# Altium PCB daq.PcbDoc (part 1 of 2)
Units mil, origin at the board's own origin, x right, y up, seen from the top; angles counter-clockwise.
Board outline 3518.7 x 2235.24 mil, 2 copper layers (Top Layer, Bottom Layer); 88 components, 70 nets, 370 pads, 56 vias.
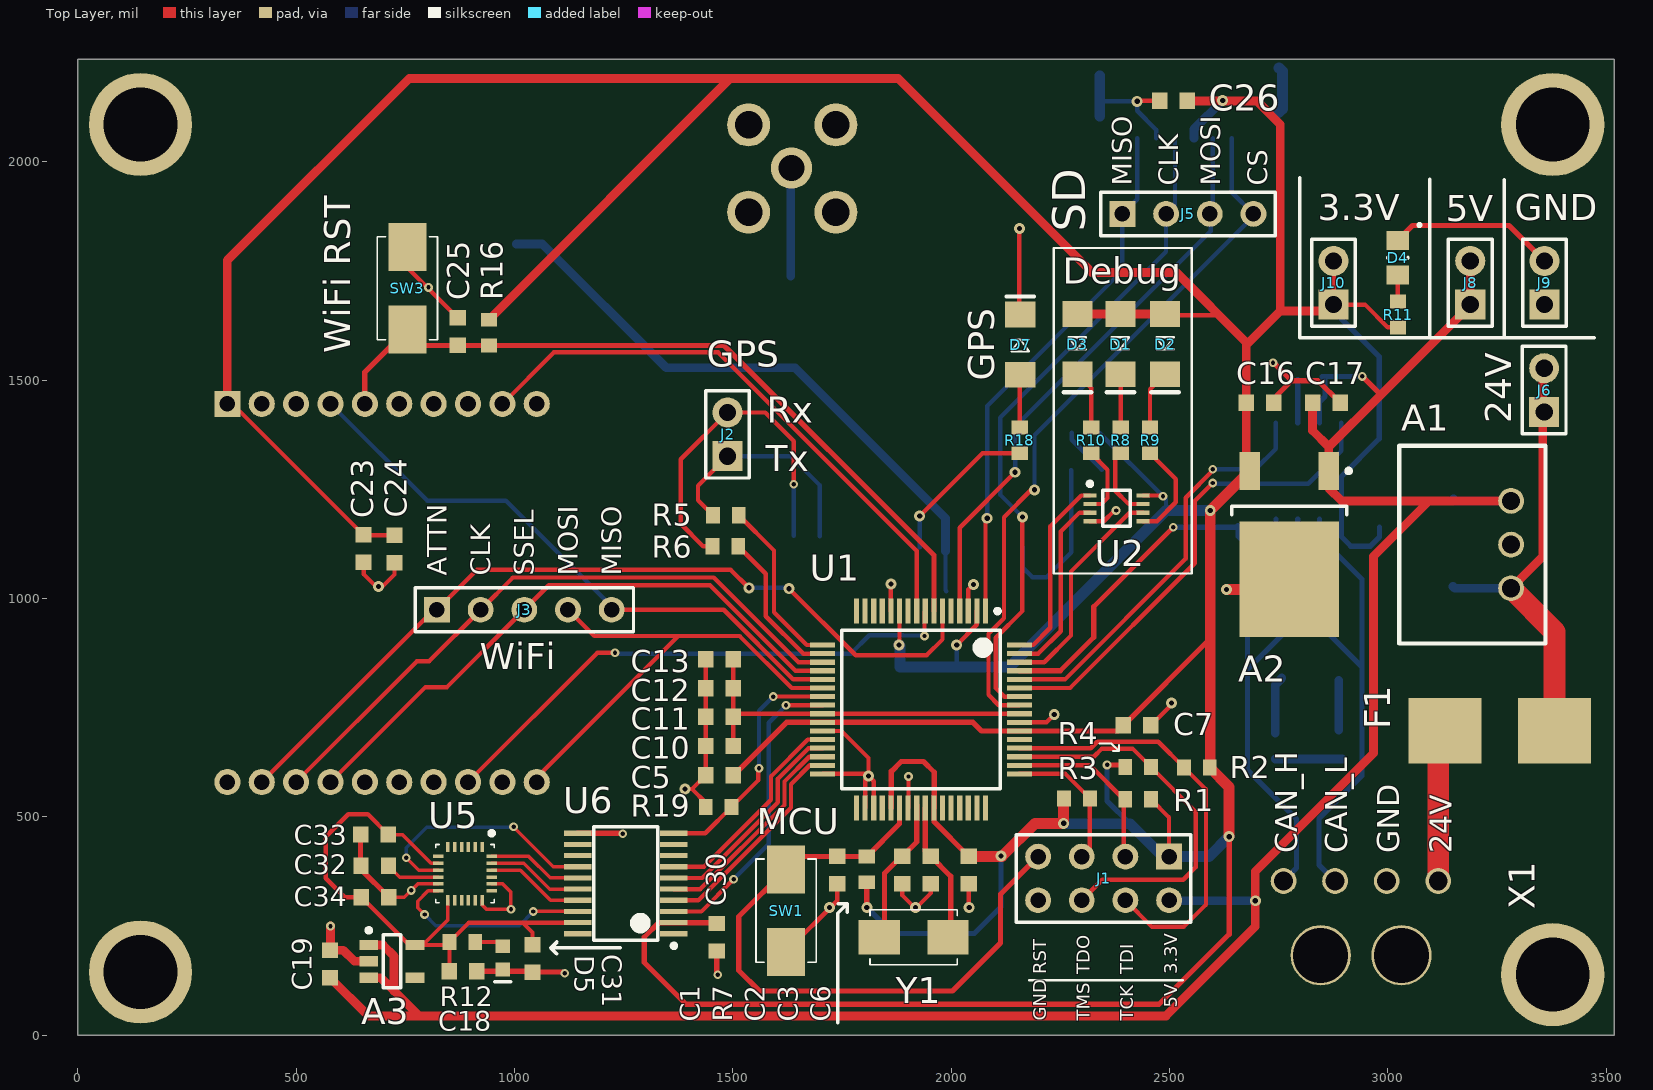
[diagram p0: Top Layer view]
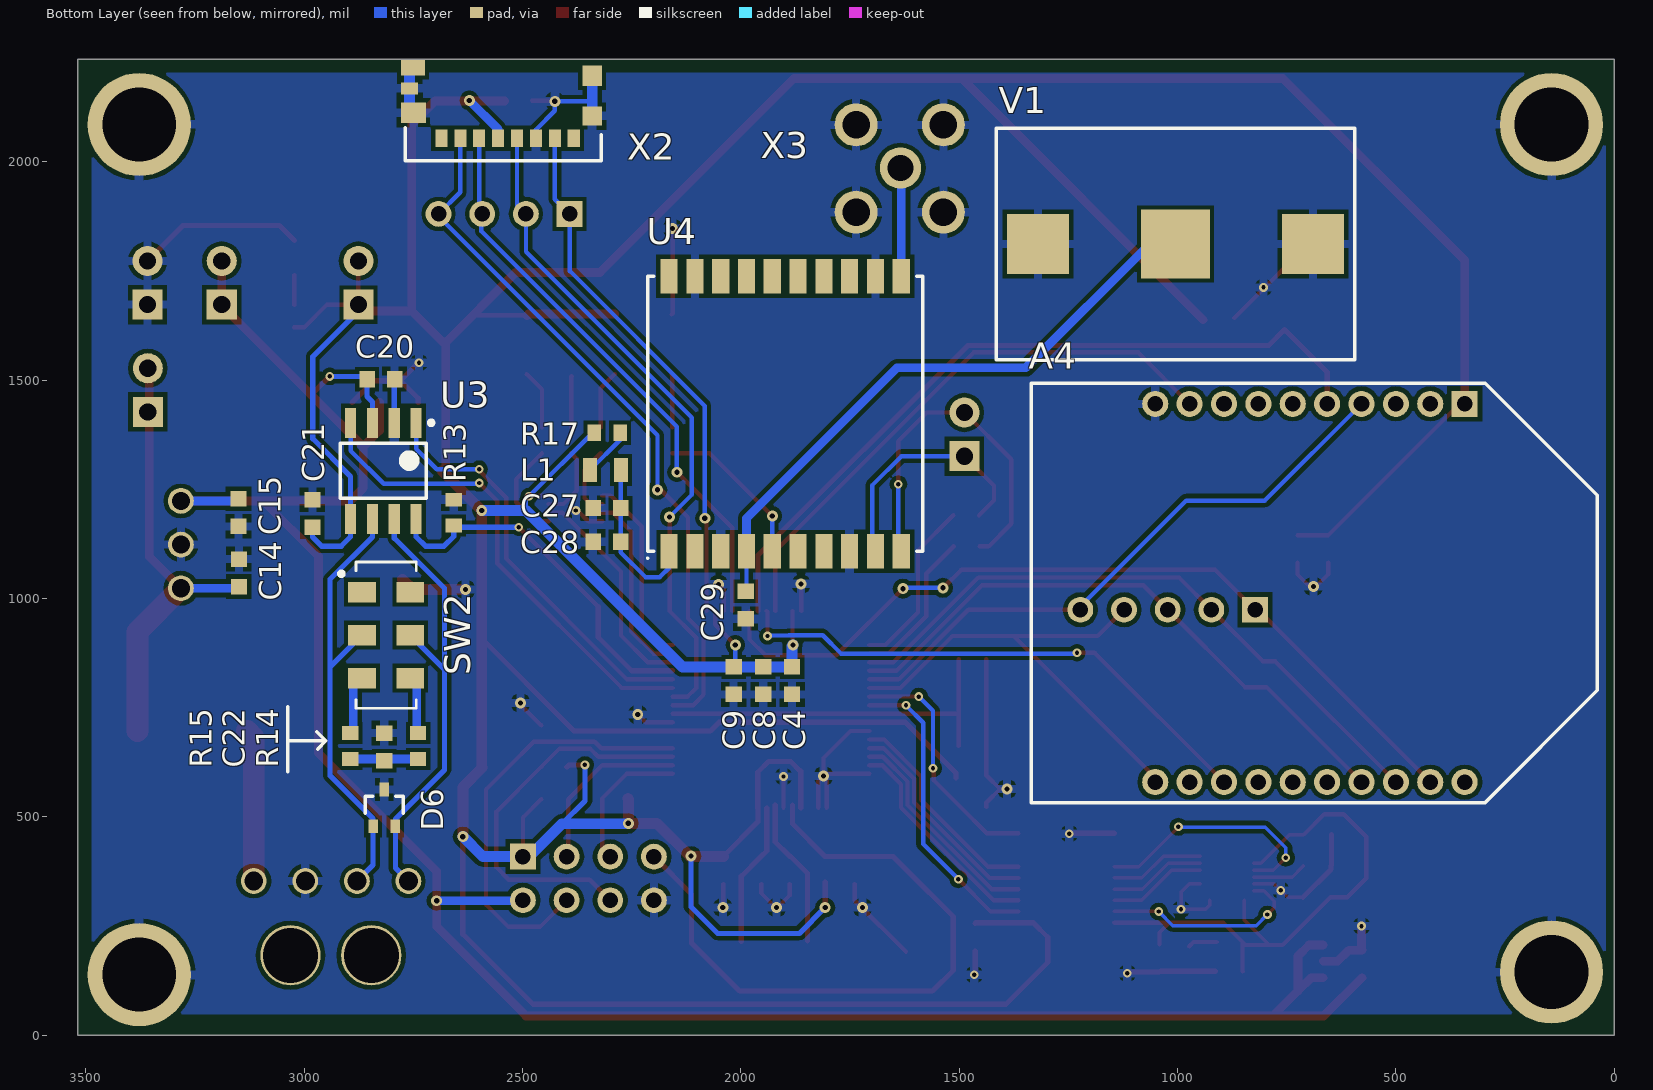
[diagram p1: Bottom Layer view, seen from below]
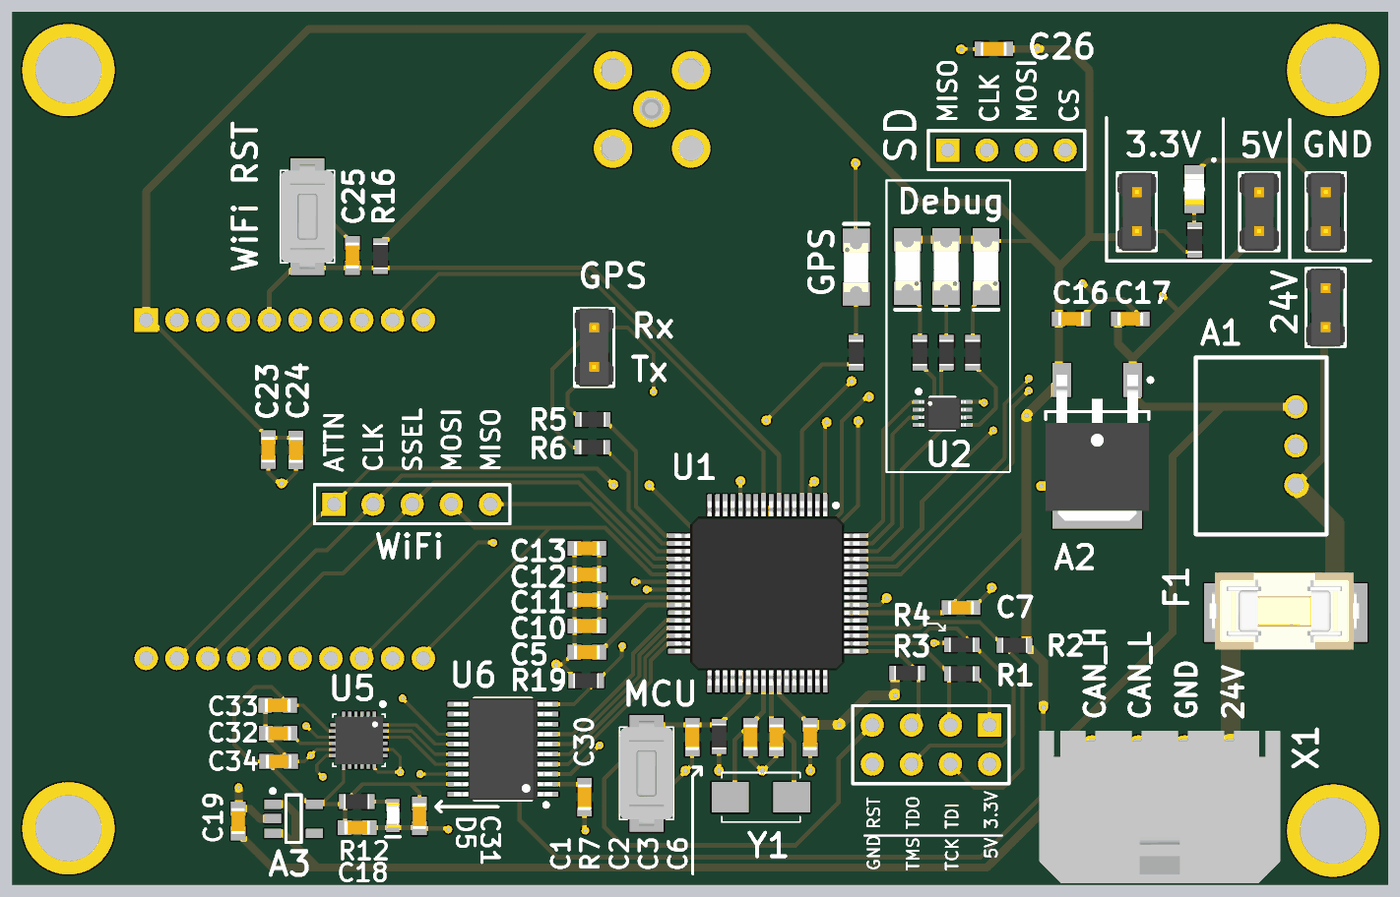
[diagram p2: 3D render of the assembled board from above, using the file's embedded part models]
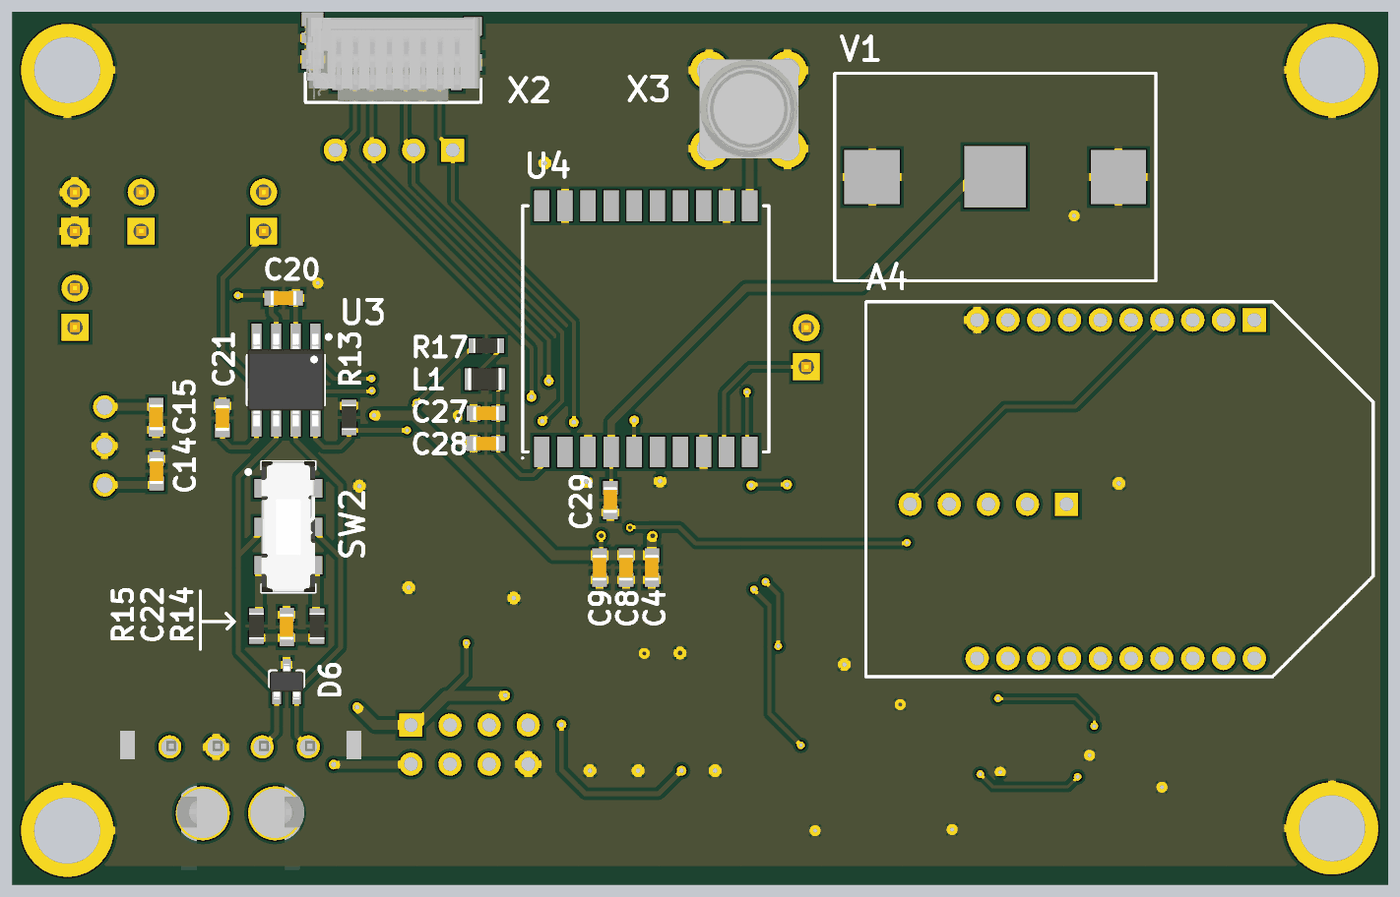
[diagram p3: 3D render of the assembled board from below, using the file's embedded part models]

## Layer stack, top to bottom
Top Solder: solder mask 0.4, Solder Resist, Dk 3.5
Top Layer: signal copper 1.4
Dielectric 1: dielectric 12.6, FR-4, Dk 4.8
Bottom Layer: signal copper 1.4
Bottom Solder: solder mask 0.4, Solder Resist, Dk 3.5

## Board outline
0,0 3518.7,0 3518.7,2235.24 0,2235.24

## Design rules (kind name [scope] priority, off if disabled: settings)
Clearance [All] p1: gap=5 ignorepadtopadclearanceinfootprint=FALSE except(0: Arc-Hole Track-Hole SMDPad-Hole THPad-Hole Via-Hole Fill-Hole Poly-Hole Region-Hole Text-Hole; 10: Arc-Poly Track-Poly SMDPad-Poly THPad-Poly Via-Poly Fill-Poly Poly-Poly Poly-Region)
HoleSize [All] p1: absolutevalues=TRUE maxlimit=200 minlimit=8 maxpercent=80.000 minpercent=20.000
MinimumSolderMaskSliver [All] p1: minsoldermaskwidth=3
NetAntennae [All] p1: netantennaetolerance=10
PlaneConnect [All] p1: planeconnectstyle=Relief reliefexpansion=20 reliefentries=4 reliefconductorwidth=10 reliefairgap=15
PolygonConnect PolygonConnect_GND [InNet('GND') vs InNet('GND')] p1: connectstyle=Relief reliefconductorwidth=20 reliefentries=4 polygonreliefangle="90 Angle" airgapwidth=10
PolygonConnect [All] p2: connectstyle=Relief reliefconductorwidth=10 reliefentries=4 polygonreliefangle="90 Angle" airgapwidth=10
RoutingVias [All] p1: holewidth=15 width=30 viastyle="Through Hole" minholewidth=8 minwidth=16 maxholewidth=120 maxwidth=100
SilkToSilkClearance [All] p1: silktosilkclearance=0
SilkToSolderMaskClearance [IsPad] p1: minsilkscreentomaskgap=0 clearancetoexposedcopper=TRUE
SolderMaskExpansion [All] p1: expansion=4
Width [All] p1: maxlimit=100 minlimit=8 preferedwidth=15
24 further rules are at their usual default settings.

## Classes and differential pairs
component class Accelerometer: C30 C31 C32 C33 C34 R19 U5 U6
component class WifiModule: A4 C23 C24 C25 R16 SW3
component class SD_card: C26 X2
component class PowerSupplies: A1 A2 A3 C14 C15 C16 C17 C18 C19 D4 D5 R11 R12
component class MCU: C1 C2 C3 C4 C5 C6 C7 C8 C9 C10 C11 C12 C13 D1 D2 D3 J1 R1 R2 R3 R4 R5 R6 R7 R8 R9 R10 SW1 U1 U2 U? Y1
component class GPS: C27 C28 C29 D7 L1 R17 R18 U4 V1 X3
component class Connectors: F1 J2 J3 J5 J6 J8 J9 J10 J11 J? X1
component class CAN: C20 C21 C22 D6 R13 R14 R15 SW2 U3

## Components (designator, comment, footprint, x,y, rotation, side; value= is the part's Value field where it differs from the comment)
A1 "5V DCDC" R-78E-0.5 3282.48,1023.62 r90 top
A2 "3.3V LDO" TO252-3 2774.61,1168.31 r270 top
A3 "TLV70018QDDCRQ1" SOT-23-5 719.49,169.29 r0 top
A4 "XBEE WI-FI S6B" Xbee_TH 342.52,1445.87 r270 bottom
C1 "CAP CER 0603 0.1uF 50V C0G 10%" C0603 1739.17,377.95 r90 top value=0.1uF
C2 "CAP CER 0603 10pF 50V C0G 5%" C0603 1887.8,377.95 r90 top value=10pF
C3 "CAP CER 0603 10pF 50V C0G 5%" C0603 1953.74,377.95 r90 top value=10pF
C4 "CAP CER 0603 0.1uF 50V C0G 10%" C0603 1882.87,812.01 r90 bottom value=0.1uF
C5 "CAP CER 0603 0.1uF 50V C0G 10%" C0603 1469.49,595.47 r0 top value=0.1uF
C6 "CAP CER 0603 0.1uF 50V C0G 10%" C0603 2040.35,377.95 r90 top value=0.1uF
C7 "CAP CER 0603 0.1uF 50V C0G 10%" C0603 2426.18,709.65 r180 top value=0.1uF
C8 "CAP CER 0603 0.01uF 50V X7R 10%" C0603 1948.82,812.01 r90 bottom value=0.01uF
C9 "CAP CER 0603 1uF 25V X7R 20%" C0603 2016.73,812.01 r90 bottom value=1uF
C10 "CAP CER 0603 0.1uF 50V C0G 10%" C0603 1469.49,662.4 r0 top value=0.1uF
C11 "CAP CER 0603 0.1uF 50V C0G 10%" C0603 1469.49,729.33 r0 top value=0.1uF
C12 "CAP CER 0603 2.2uF 6.3V X7R 10%" C0603 1469.49,794.29 r0 top value=2.2uF
C13 "CAP CER 0603 1uF 25V X7R 20%" C0603 1469.49,861.22 r0 top value=1uF
C14 "CAP CER 0603 1uF 25V X7R 20%" C0603 3149.61,1059.06 r270 bottom value=1uF
C15 "CAP CER 0603 1uF 25V X7R 20%" C0603 3150.59,1196.85 r90 bottom value=1uF
C16 "CAP CER 0603 4.7uF 25V X7R 10%" C0603 2707.68,1448.82 r180 top value=4.7uF
C17 "CAP CER 0603 10uF 6.3V X5R 20%" C0603 2859.25,1448.82 r180 top value=10uF
C18 "CAP CER 0603 1uF 16V X7R 10%" C0603 881.89,146.65 r180 top value=1uF
C19 "CAP CER 0603 1uF 16V X7R 10%" C0603 577.76,163.39 r270 top value=1uF
C20 "CAP CER 0603 2.2uF 6.3V X7R 10%" C0603 2824.8,1501.97 r0 bottom value=2.2uF
C21 "CAP CER 0603 0.1uF 50V C0G 10%" C0603 2981.3,1194.88 r270 bottom value=0.1uF
C22 "CAP CER 0603 47nF 50V X7R 10%" C0603 2816.93,660.43 r90 bottom value=47nF
C23 "CAP CER 0603 1uF 25V X7R 20%" C0603 654.53,1114.17 r90 top value=1uF
C24 "CAP CER 0603 8.2pF 50V COG ±0.5pF" C0603 725.39,1113.19 r90 top value=8.2pF
C25 "CAP CER 0603 0.1uF 50V C0G 10%" C0603 870.08,1611.16 r270 top value=0.1uF
C26 "CAP CER 0603 0.1uF 50V C0G 10%" C0603 2509.84,2139.76 r0 top value=0.1uF
C27 "CAP CER 0603 1uF 25V X7R 20%" C0603 2307.09,1207.35 r180 bottom value=1uF
C28 "CAP CER 0603 0.01uF 50V X7R 10%" C0603 2307.09,1129.92 r180 bottom value=0.01uF
C29 "CAP CER 0603 1uF 16V X7R 10%" C0603 1989.17,985.24 r90 bottom value=1uF
C30 "CAP CER 0603 0.1uF 50V C0G 10%" C0603 1463.58,224.41 r90 top value=0.1uF
C31 "CAP CER 0603 0.1uF 50V C0G 10%" C0603 1041.34,176.18 r90 top value=0.1uF
C32 "CAP CER 0603 0.1uF 50V C0G 10%" C0603 680.12,387.8 r0 top value=0.1uF
C33 "CAP CER 0603 0.1uF 50V C0G 10%" C0603 679.13,459.65 r0 top value=0.1uF
C34 "CAP CER 0603 0.1uF 50V C0G 10%" C0603 681.1,315.94 r180 top value=0.1uF
D1 "Green LED" LED1206 2387.8,1582.68 r90 top
D2 "Yellow" LED1206 2490.16,1582.68 r90 top
D3 "Red" LED1206 2289.37,1582.68 r90 top
D4 "Green 0805 LED" LED0805 3022.64,1780.51 r270 top
D5 "Green LED" LED0603 973.43,177.17 r90 top
D6 "ESD Protection" SOT323 2816.93,520.67 r90 bottom
D7 "Green" LED1206 2158.46,1581.69 r270 top
F1 "Fuse Holder" 154_OMNI-BLOK 3131.1,696.85 r0 top value=500mA
J1 "JTAG" JTAG_Header 2499.21,409.06 r180 top
J2 "Header 2" HDR1X2 1488.19,1326.18 r90 top
J3 "Header, Xbee SPI" HDR1X5 822.64,974.41 r0 top
J5 "SD SPI" HDR1X4 2392.52,1880.91 r0 top
J6 "Header for debugging" HDR1X2 3358.27,1427.56 r90 top
J8 "Header for debugging" HDR1X2 3188.98,1673.23 r90 top
J9 "Header for debugging" HDR1X2 3358.92,1673.23 r90 top
J10 "Header for debugging" HDR1X2 2875.98,1673.23 r90 top
L1 "Ferrite bead 60R@100MHz" I0805 2310.04,1294.62 r180 bottom value="60 Ohms @ 100 MHz"
R1 "RES 0603 100k 5% 0.1W" R0603 2428.15,540.35 r0 top value=100k
R2 "RES 0603 100k 5% 0.1W" R0603 2562.99,613.19 r0 top value=100k
R3 "RES 0603 100k 5% 0.1W" R0603 2288.39,542.32 r180 top value=100k
R4 "RES 0603 100k 5% 0.1W" R0603 2428.15,614.17 r180 top value=100k
R5 "RES 0603 100R 5% 1/4W" R0603 1484.25,1190.94 r180 top value=100
R6 "RES 0603 100R 5% 1/4W" R0603 1483.27,1120.08 r180 top value=100
R7 "RES 0603 10k 5% 0.1W" R0603 1807.09,379.92 r270 top value=10k
R8 "RES 0603 220R 5% 0.25W" R0603 2388.78,1362.2 r90 top value=220R
R9 "RES 0603 220R 5% 0.25W" R0603 2455.71,1362.2 r90 top value=220R
R10 "RES 0603 220R 5% 0.25W" R0603 2320.87,1362.2 r90 top value=220R
R11 "RES 0603 220R 5% 0.25W" R0603 3023.62,1650.59 r270 top value=220R
R12 "RES 0603 220R 5% 0.25W" R0603 880.91,213.58 r180 top value=220R
R13 "RES 0603 10k 1% 0.1W" R0603 2657.48,1196.85 r270 bottom value=10k
R14 "RES 0603 60R 1% 0.25W" R0603 2739.45,662.4 r90 bottom value=60R
R15 "RES 0603 60R 1% 0.25W" R0603 2894.41,662.4 r90 bottom value=60R
R16 "RES 0603 4.7k 5% 0.1W" R0603 941.93,1609.25 r90 top value=4.7k
R17 "RES 0603 0R" R0603 2306.1,1379.92 r180 bottom value=0R
R18 "RES 0603 220R 5% 1/4W" R0603 2157.48,1362.2 r270 top value=220R
R19 "RES 0603 10k 1% 0.1W" R0603 1467.52,522.64 r0 top value=10k
SW1 "147873-1" 147873 1622.05,285.43 r90 top
SW2 "CL-SB-22A-01T" CL-SB-22A-01T 2812.68,916.34 r180 bottom
SW3 "147873-1" 147873 754.92,1710.63 r270 top
U1 "32-bit MCU" LQFP-64 1931.1,746.06 r270 top
U2 "Buffer" "8-VFSOP - TI - DCM (S-PDSO-G8)" 2378.94,1206.69 r0 top
U3 "CAN Transceiver" SOIC-8 2818.9,1292.32 r270 bottom
U4 "FGPMMOPA6H" FGPMMOPA6H 1898.62,1423.23 r90 bottom
U5 "ICM-20948" QFN-24 764.76,248.03 r270 top
U6 "Level Shifter + ESD" "PW (R-PDSO-G20)" 1254.92,347.44 r180 top
V1 "S8201-46R" S8201-46R 1004.92,1812.01 r180 bottom
X1 "Connector" 43650-0400 3115.75,353.15 r0 top
X2 "Micro SD (SPI)" 475710001 2382.87,2054.13 r0 bottom
X3 "SMA-F Connector" SMA-F 1536.22,2084.84 r270 bottom
Y1 "NX5043GA-16.00MHz" NX5032GA 1914.37,224.41 r0 top value=16MHz

## Footprints (in the part's own frame and the unit in brackets; to place one, negate y for a bottom-side part, rotate by r counter-clockwise, add the part's x,y. Pads: shape width x height; smd on the part's side, far side on the other; paste and mask are expansions set on the pad)
"8-VFSOP - TI - DCM (S-PDSO-G8)" [mm] "TSSOP, 8-Leads, Body 2.00x2.30mm, Pitch 0.50mm, IPC Medium Density"
  rect 0.75x0.25 smd paste+0 mask+0.051: 1(-1.55,0.75) 2(-1.55,0.25) 3(-1.55,-0.25) 4(-1.55,-0.75) 5(1.55,-0.75) 6(1.55,-0.25) 7(1.55,0.25) 8(1.55,0.75)
  silkscreen extent -1.67,-1.05 0.8,1.55, body extent -1.55,-1.05 1.55,1.05, height 0.9
154_OMNI-BLOK [mm] "154 OMNI-BLOK® Fuse Holder"
  rect 4.24x3.81 smd: 1(0,0) 2(6.37,0)
  body extent -1.75,-2.4 7.95,2.6, height 3.74
43650-0400 [mm] "Molex Micro-Fit 3.0, 4 Circuits, Single Row, Right-Angle Header, Through-Hole, 3.00mm Pitch, Tin, Black"
  round 3.5 hole 3.2: 0(-6.84,-4.32) 0(-2.14,-4.32)
  round 1.5 hole 1.1: 1(0,0) 2(-3,0) 3(-6,0) 4(-9,0)
  body extent -12.43,-8.85 3.23,1.05, height 5.14
147873 [mm]
  rect 2.8x2.2 smd: 1(-2.4,0) 2(2.4,0)
  silkscreen extent -3,-1.75 3,1.75, body extent -3.4,-1.75 3.4,1.75, height 5.15
475710001 [mm] "9 (8 + 1) Position Card Connector Secure Digital - microSD™ Surface Mount, Right Angle Gold"
  rect 1.15x1.2 smd mask+0.1: 0(-1.075,-3.64)
  rect 1.15x1.1 smd mask+0.05: 0(-1.075,-1.3)
  rect 1.45x1.2 smd mask+0.1: 0(9.325,-1.49)
  rect 1.4x0.9 smd mask+0.1: 0(9.35,-4.1)
  rect 1x0.7 smd mask+0.1: 0(9.55,-2.89)
  rect 0.7x1 smd mask+0.1: 1(7.7,0) 2(6.6,0) 3(5.5,0) 4(4.4,0) 5(3.3,0) 6(2.2,0) 7(1.1,0) 8(0,0)
  silkscreen extent -1.6,-0.6 9.8,1.3, body extent -1.58,-15.3 9.82,1.25, height 2.31
C0603 [mm] "0603 Chip Capacitor, 2-Leads, Body 1,60x0,80mm, IPC Medium Density"
  rect 0.9x0.95 smd: 1(-0.8,0) 2(0.8,0)
  body extent -0.85,-0.45 0.85,0.45, height 0.9
CL-SB-22A-01T [mm] "CL-SB-22A-01T Slide Switch, Flat, 6-Leads, Pitch 2,50mm,  Body 8,50x3,50mm,  IPC Medium Density"
  rect 1.6x1.2 smd: 1(-1.4,2.5) 2(-1.4,0) 3(-1.4,-2.5) 4(1.4,2.5) 5(1.4,0) 6(1.4,-2.5)
  silkscreen extent -2.73,-4.25 1.75,4.25, body extent -1.75,-4.25 1.75,4.25, height 5.5
FGPMMOPA6H [mm] "FGPMMOPA6H, SON, 20-Leads, Body 16,00x16,00mm, Pitch 1,50mm, IPC Medium Density"
  rect 2x1 smd: 1(-8,6.75) 2(-8,5.25) 3(-8,3.75) 4(-8,2.25) 5(-8,0.75) 6(-8,-0.75) 7(-8,-2.25) 8(-8,-3.75) 9(-8,-5.25) 10(-8,-6.75) 11(8,-6.75) 12(8,-5.25) 13(8,-3.75) 14(8,-2.25) 15(8,-0.75) 16(8,0.75) 17(8,2.25) 18(8,3.75) 19(8,5.25) 20(8,6.75)
  silkscreen extent -8.45,-8 8,8.05, body extent -8,-8 8,8, height 5.2
HDR1X2 [mm] "Connector; Header; 2 Position"
  rect 1.75x1.75 hole 1: 1(0,0)
  round 1.75 hole 1: 2(2.54,0)
  silkscreen extent -1.27,-1.27 3.81,1.27, body extent -1.27,-1.27 3.81,1.27, height 9.5
HDR1X4 [mm] "Connector; Header; 4 Position"
  rect 1.5x1.5 hole 0.9: 1(0,0)
  round 1.5 hole 0.9: 2(2.54,0) 3(5.08,0) 4(7.62,0)
  silkscreen extent -1.27,-1.27 8.89,1.27
HDR1X5 [mm] "Connector; Header; 5 Position"
  rect 1.5x1.5 hole 0.9: 1(0,0)
  round 1.5 hole 0.9: 2(2.54,0) 3(5.08,0) 4(7.62,0) 5(10.16,0)
  silkscreen extent -1.27,-1.27 11.43,1.27
I0805 [mm] "Chip Inductor, 2-Leads, Body 2,00x1,25mm, IPC Medium Density"
  rect 0.8x1.4 smd: 1(-0.9,0) 2(0.9,0)
  body extent -1.1,-0.72 1.1,0.72, height 1.45
JTAG_Header [mm] "Programming header"
  rect 1.5x1.5 hole 0.9: 1(0,0)
  round 1.5 hole 0.9: 2(0,2.54) 3(2.54,0) 4(2.54,2.54) 5(5.08,0) 6(5.08,2.54) 7(7.62,0) 8(7.62,2.54)
  silkscreen extent -1.27,-1.27 8.89,3.81
LED0603 [mm] "Chip Diode, 2-Leads, Body 1,60x0,75mm, IPC Medium Density"
  rect 0.8x0.85 smd: 1(-0.675,0) 2(0.675,0)
  silkscreen extent -1.38,-0.48 -1.38,0.48, body extent -0.77,-0.42 0.83,0.38, height 1.09
LED0805 [mm] "Chip Diode, 2-Leads, Body 2.00x1.25mm, IPC Medium Density"
  rect 1.1x1.3 smd: 1(-1,0) 2(1,0)
  silkscreen extent -1.99,-0.6 0.05,1.36, body extent -1,-0.62 1,0.62, height 0.72
LED1206 [mm] "LED 1206"
  rect 1.5x1.75 smd: 1(1.75,0) 2(-1.75,0)
  silkscreen extent -2.8,-0.8 0.4,0.8, body extent -1.55,-0.81 1.65,0.79, height 1.1
LQFP-64 [mm] "TSQFP, 64-Leads, Body 10,00x10,00mm, Pitch 0,50mm, IPC Medium Density"
  rect 1.45x0.3 smd: 1(-5.725,3.75) 2(-5.725,3.25) 3(-5.725,2.75) 4(-5.725,2.25) 5(-5.725,1.75) 6(-5.725,1.25) 7(-5.725,0.75) 8(-5.725,0.25) 9(-5.725,-0.25) 10(-5.725,-0.75) 11(-5.725,-1.25) 12(-5.725,-1.75) 13(-5.725,-2.25) 14(-5.725,-2.75) 15(-5.725,-3.25) 16(-5.725,-3.75) 33(5.725,-3.75) 34(5.725,-3.25) 35(5.725,-2.75) 36(5.725,-2.25) 37(5.725,-1.75) 38(5.725,-1.25) 39(5.725,-0.75) 40(5.725,-0.25) 41(5.725,0.25) 42(5.725,0.75) 43(5.725,1.25) 44(5.725,1.75) 45(5.725,2.25) 46(5.725,2.75) 47(5.725,3.25) 48(5.725,3.75)
  rect 0.3x1.45 smd: 17(-3.75,-5.725) 18(-3.25,-5.725) 19(-2.75,-5.725) 20(-2.25,-5.725) 21(-1.75,-5.725) 22(-1.25,-5.725) 23(-0.75,-5.725) 24(-0.25,-5.725) 25(0.25,-5.725) 26(0.75,-5.725) 27(1.25,-5.725) 28(1.75,-5.725) 29(2.25,-5.725) 30(2.75,-5.725) 31(3.25,-5.725) 32(3.75,-5.725) 49(3.75,5.725) 50(3.25,5.725) 51(2.75,5.725) 52(2.25,5.725) 53(1.75,5.725) 54(1.25,5.725) 55(0.75,5.725) 56(0.25,5.725) 57(-0.25,5.725) 58(-0.75,5.725) 59(-1.25,5.725) 60(-1.75,5.725) 61(-2.25,5.725) 62(-2.75,5.725) 63(-3.25,5.725) 64(-3.75,5.725)
  silkscreen extent -5.85,-4.6 4.6,4.6, body extent -5.99,-6.01 6.01,5.99, height 1.6
NX5032GA [mm]
  rect 2.4x2 smd: 1(-2,0) 2(2,0)
  silkscreen extent -2.54,-1.6 2.54,1.6, body extent -2.54,-1.6 2.54,1.6, height 1.3
"PW (R-PDSO-G20)" [mm] "Texas Instruments, PW (R-PDSO-G20), 20-TSSOP, 20-Leads, Body 6.50x4.40mm, Pitch 0.65mm, IPC Medium Density"
  rect 1.6x0.3 smd: 1(-2.8,2.925) 2(-2.8,2.275) 3(-2.8,1.625) 4(-2.8,0.975) 5(-2.8,0.325) 6(-2.8,-0.325) 7(-2.8,-0.975) 8(-2.8,-1.625) 9(-2.8,-2.275) 10(-2.8,-2.925) 11(2.8,-2.925) 12(2.8,-2.275) 13(2.8,-1.625) 14(2.8,-0.975) 15(2.8,-0.325) 16(2.8,0.325) 17(2.8,0.975) 18(2.8,1.625) 19(2.8,2.275) 20(2.8,2.925)
  silkscreen extent -2.93,-3.3 1.85,3.75, body extent -3.2,-3.3 3.2,3.3, height 1.2
QFN-24 [mm] "ACCEL/GYRO/MAGNETO"
  rect 0.6x0.2 smd: 1(-4.65,4.1) 2(-4.65,3.7) 3(-4.65,3.3) 4(-4.65,2.9) 5(-4.65,2.5) 6(-4.65,2.1) 13(-1.55,2.1) 14(-1.55,2.5) 15(-1.55,2.9) 16(-1.55,3.3) 17(-1.55,3.7) 18(-1.55,4.1)
  rect 0.2x0.6 smd: 7(-4.1,1.55) 8(-3.7,1.55) 9(-3.3,1.55) 10(-2.9,1.55) 11(-2.5,1.55) 12(-2.1,1.55) 19(-2.1,4.65) 20(-2.5,4.65) 21(-2.9,4.65) 22(-3.3,4.65) 23(-3.7,4.65) 24(-4.1,4.65)
  silkscreen extent -5.57,1.4 -1.4,4.8, body extent -4.67,1.53 -1.53,4.67, height 1.05
R0603 [mm] "R0603 Chip Resistor, 2-Leads, Body 1,57x0,85mm, IPC Medium Density"
  rect 0.8x0.95 smd: 1(-0.75,0) 2(0.75,0)
  body extent -0.82,-0.48 0.82,0.48, height 0.5
R-78E-0.5 [mm] "Through hole DCDC"
  round 1.5 hole 1.05: 1(0,0) 2(2.54,0) 3(5.08,0)
  silkscreen extent -3.21,-2 8.29,6.5, body extent -3.2,-2 8.3,6.5, height 10.4
S8201-46R [mm] "CR1225 Coin Holder, SMT"
  rect 4x4 smd: 1(0,0)
  rect 3.6x3.5 smd: 2(-8,0) 2(8,0)
  silkscreen extent -10.43,-6.74 10.43,6.74, body extent -10.41,-6.86 10.41,6.73, height 3.2
SMA-F [mm]
  round 2.5 hole 1.6: 1(0,-5.08) 1(0,0) 1(5.08,-5.08) 1(5.08,0)
  round 2.4 hole 1.5: 2(2.504,-2.504)
  body extent -0.7,-5.7 5.7,0.7, height 10
SOIC-8 [mm] "SOIC, 8-Leads, Body 4.90x3.90mm, Pitch 1.27mm, IPC Medium Density"
  rect 1.75x0.65 smd: 1(-2.8,1.905) 2(-2.8,0.635) 3(-2.8,-0.635) 4(-2.8,-1.905) 5(2.8,-1.905) 6(2.8,-0.635) 7(2.8,0.635) 8(2.8,1.905)
  silkscreen extent -2.92,-2.5 1.6,2.9, body extent -3,-2.5 3,2.5, height 1.75
SOT323 [mm] "SOT323, 3-Leads, Body 2.00x2.10mm, Pitch 0.65mm, IPC Medium Density"
  rect 0.8x0.55 smd: 1(-1.075,0.65) 2(-1.075,-0.65) 3(1.075,0)
  silkscreen extent -0.32,-1.1 0.67,1.1, body extent -1.15,-1.1 1.15,1.1, height 1.1
SOT-23-5 [mm] "SOT23, 5-Leads, Body 2.90x2.80mm, Pitch 0.95mm, IPC Medium Density"
  rect 1.1x0.6 smd: 1(-1.35,0.95) 2(-1.35,0) 3(-1.35,-0.95) 4(1.35,-0.95) 5(1.35,0.95)
  silkscreen extent -1.47,-1.55 0.5,1.92, body extent -0.87,-1.52 0.87,1.53, height 1.1
TO252-3 [mm] "TO252-3, 3-Pads, Body 5,95x6,71mm (max), IPC Medium Density"
  rect 2.2x1.2 smd: 1(-3.15,2.3) 3(-3.15,-2.3)
  rect 6.7x5.8 smd: 2(3.15,0)
  silkscreen extent -3.27,-3.35 -0.6,3.58, body extent -3.5,-3.35 6,3.35, height 2.5
Xbee_TH [mm] "Xbee module, through whole"
  rect 1.52x1.52 / inner rect 2.5x1.2 / far side rect 1.52x1.52 hole 0.91: 1(0,0)
  round 1.52 / inner oval 2.5x1.2 / far side round 1.52 hole 0.91: 2(0,-2) 3(0,-4) 4(0,-6) 5(0,-8) 6(0,-10) 7(0,-12) 8(0,-14) 9(0,-16) 10(0,-18) 11(22,-18) 12(22,-16) 13(22,-14) 14(22,-12) 15(22,-10) 16(22,-8) 17(22,-6) 18(22,-4) 19(22,-2) 20(22,0)
  silkscreen extent -1.19,-25.22 23.19,7.72, body extent -1.08,-25.61 23.3,20.61, height 8.25

## Part data
A1: library part R78E5.0-0.5, Manufacturer=Recom, Efficiency=82-92%, Iout=500mA, Part_Number=R-78E5.0-0.5, Price=4.04, Price_10=3.972, Supplier_Link=http://www.digikey.ca/product-detail/en/R-78E5.0-0.5/945-1648-5-ND/2834904, Vin=7-28V, Vout=5V
A2: library part NCV5501DT33RKG, "Linear Voltage Regulator IC Positive Fixed 1 Output 3.3V 500mA DPAK-3", Manufacturer="ON Semiconductor", Supplier Part Number 1=NCV5501DT33RKGOSCT-ND, Iout="500 mA", Part_Number=NCV5501DT33RKG, Price=1.33, Price_10=1.194, Supplier 1=Digi-Key, Supplier_Link=http://www.digikey.ca/product-detail/en/on-semiconductor/NCV5501DT33RKG/NCV5501DT33RKGOSCT-ND/3462418, Vout=3.3V
A3: "Linear Voltage Regulator IC Positive Fixed 1 Output 1.8V 300mA SOT-23-5", Manufacturer="Texas Instruments", Part_Number=TLV70018QDDCRQ1, Supplier_Link=https://www.digikey.ca/product-detail/en/texas-instruments/TLV70018QDDCRQ1/296-36761-1-ND/4341463
A4: "Module Wifi", Manufacturer="Digi International", Supplier Part Number 1=602-1380-ND, Part_Number=XB2B-WFST-001, Price=36.19, Supplier 1=Digi-Key, Supplier_Link=http://www.digikey.com/product-search/en?mpart=XB2B-WFST-001&vendor=602
C1 C4 C5 C6 C7 C10 C11 C25: "0.1uF ceramic capacitor", Manufacturer="TDK Corporation", Tolerance=10%, Voltage rating=50V, Part_Number=CGA3E2X7R1H104K080AA, Price=0.14, Price_10=0.102, Supplier_Link=http://www.digikey.ca/product-detail/en/CGA3E2X7R1H104K080AA/445-5666-1-ND/2443706
C2 C3: "10pF ceramic capacitor", Manufacturer="TDK Corporation", Tolerance=5%, Voltage rating=50V, Part_Number=CGA3E2C0G1H100D080AA, Price=0.14, Price_10=0.077, Supplier_Link=http://www.digikey.ca/product-detail/en/CGA3E2C0G1H100D080AA/445-5628-1-ND/2443668
C8: "0.01uF ceramic capacitor", Manufacturer="TDK Corporation", Tolerance=10%, Voltage rating=50V, Part_Number=CGA3E2X7R1H103K080AA, Price=0.14, Price_10=0.102, Supplier_Link=http://www.digikey.ca/product-detail/en/CGA3E2X7R1H103K080AA/445-5662-1-ND/2443702
C9 C13 C14 C15: "1uF ceramic capacitor", Manufacturer="TDK Corporation", Tolerance=20%, Voltage rating=25V, Part_Number=CGA3E1X7R1E105M080AC, Price=0.24, Price_10=0.171, Supplier_Link=http://www.digikey.ca/product-detail/en/CGA3E1X7R1E105M080AC/445-12548-1-ND/3954214
C12: "2.2uF ceramic capacitor", Manufacturer="TDK Corporation", Tolerance=10%, Voltage rating=6.3V, Part_Number=CGA3E1X7R0J225K080AC, Price=0.34, Price_10=0.235, Supplier_Link=http://www.digikey.ca/product-detail/en/CGA3E1X7R0J225K080AC/445-6933-1-ND/2672951
C16: "4.7uF ceramic capacitor", Manufacturer=Kernet, Supplier Part Number 1=399-7029-1-ND, Tolerance=10%, Voltage rating=25V, Part_Number=C1206C475K3RACAUTO, Price=0.48, Price_10=0.428, Supplier 1=Digi-Key, Supplier_Link=http://www.digikey.ca/product-detail/en/CGA3E3X7R1E474K080AB/445-6929-1-ND/2672947
C17: "10uF ceramic capacitor", Manufacturer="Taiyo Yuden", Supplier Part Number 1=587-3383-1-ND, Tolerance=20%, Voltage rating=6.3V, Part_Number=JMK107ABJ106MAHT, Price=0.30, Price_10=0.205, Supplier 1=Digi-Key, Supplier_Link=http://www.digikey.ca/product-detail/en/JMK107ABJ106MAHT/587-3383-1-ND/4157249
C18 C19 C29: "1uF ceramic capacitor", Manufacturer="Samsung Electro-Mechanics", Supplier Part Number 1=1276-6613-1-ND, Tolerance=10%, Voltage rating=16V, Part_Number=CL10B105KO8VPNC, Price=0.32, Supplier 1=Digi-Key, Supplier_Link=https://www.digikey.ca/product-detail/en/samsung-electro-mechanics/CL10B105KO8VPNC/1276-6613-1-ND/5961472
C20: "2.2uF ceramic capacitor", Manufacturer="TDK Corporation", Supplier Part Number 1=445-6933-1-ND, Tolerance=10%, Voltage rating=6.3V, Part_Number=CGA3E1X7R0J225K080AC, Price=0.34, Supplier 1=Digi-Key, Supplier_Link=http://www.digikey.ca/product-detail/en/CGA3E1X7R0J225K080AC/445-6933-1-ND/2672951
C21 C32 C33 C34: "0.1uF ceramic capacitor", Manufacturer="Murata Electronics North America", Supplier Part Number 1=490-4779-1-ND, Tolerance=10%, Voltage rating=50V, Part_Number=GCM188R71H104KA57D, Price=0.45, Supplier 1=Digi-Key, Supplier_Link=https://www.digikey.ca/product-detail/en/murata-electronics-north-america/GCM188R71H104KA57D/490-4779-1-ND/1641698
C22: "47nF ceramic capacitor", Manufacturer="Murata Electronics North America", Supplier Part Number 1=490-5854-1-ND, Tolerance=10%, Voltage rating=50V, Part_Number=GCJ188R71H473KA12D, Price=0.45, Supplier 1=Digi-Key, Supplier_Link=https://www.digikey.ca/product-detail/en/murata-electronics-north-america/GCJ188R71H473KA12D/490-5854-1-ND/2785840
C23: "1uF ceramic capacitor", Manufacturer="TDK Corporation", Supplier Part Number 1=445-12548-1-ND, Tolerance=20%, Voltage rating=25V, Part_Number=CGA3E1X7R1E105M080AC, Price=0.24, Price_10=0.171, Supplier 1=Digi-Key, Supplier_Link=http://www.digikey.ca/product-detail/en/CGA3E1X7R1E105M080AC/445-12548-1-ND/3954214
C24: "8.2pF 50V Ceramic Capacitor C0G, NP0 0603", Manufacturer=Murata-Electronics-North-America, Supplier Part Number 1=490-11155-1-ND, Tolerance=±0.5pF, Voltage rating=50V, Part_Number=GCM1885C1H8R2DA16D, Price=0.15, Price_10=0.111, Supplier 1=Digi-Key, Supplier_Link=http://www.digikey.ca/product-detail/en/murata-electronics-north-america/GCM1885C1H8R2DA16D/490-11155-1-ND/5332995
C26 C30 C31: "0.1uF ceramic capacitor", Manufacturer="TDK Corporation", Supplier Part Number 1=445-5666-1-ND, Tolerance=10%, Voltage rating=50V, Part_Number=CGA3E2X7R1H104K080AA, Price=0.14, Supplier 1=Digi-Key, Supplier_Link=http://www.digikey.ca/product-detail/en/CGA3E2X7R1H104K080AA/445-5666-1-ND/2443706
  C26: Price_10=0.102
C27: "1uF ceramic capacitor", Manufacturer="TDK Corporation", Manufacturer Part Number=CGA3E1X7R1E105M080AC, Supplier Part Number 1=445-12548-1-ND, Tolerance=20%, Voltage rating=25V, Part_Number=CGA3E1X7R1E105M080AC, Price=0.24, Supplier 1=Digi-Key, Supplier_Link=http://www.digikey.ca/product-detail/en/CGA3E1X7R1E105M080AC/445-12548-1-ND/3954214
C28: "0.01uF ceramic capacitor", Manufacturer="TDK Corporation", Manufacturer Part Number=CGA3E2X7R1H103K080AA, Supplier Part Number 1=445-5662-1-ND, Tolerance=10%, Voltage rating=50V, Part_Number=CGA3E2X7R1H103K080AA, Price=0.14, Supplier 1=Digi-Key, Supplier_Link=http://www.digikey.ca/product-detail/en/CGA3E2X7R1H103K080AA/445-5662-1-ND/2443702
D1: library part LTST-C150KGKT, "Green LED 1206", Manufacturer=Liteon, Part_Number=LTST-C150KGKT, Price=0.55, Price_10=0.40, Supplier_Link=http://www.digikey.ca/product-detail/en/LTST-C150KGKT/160-1404-1-ND/386759
D2: library part LTST-C150KSKT, "Yellow LED 1206", Manufacturer=Liteon, Part_Number=LTST-C150KSKT, Price=0.55, Price_10=0.40, Supplier_Link=http://www.digikey.ca/product-detail/en/LTST-C150KSKT/160-1406-1-ND/386762
D3: library part LTST-C150KRKT, "Red LED 1206", Manufacturer=Liteon, Part_Number=LTST-C150KRKT, Price=0.55, Price_10=0.40, Supplier_Link=http://www.digikey.ca/product-detail/en/LTST-C150KRKT/160-1405-1-ND/386760
D4: library part APT2012LZGCK, "Green 525nm LED Indication - Discrete 2.65V 0805 (2012 Metric)", Forward_Voltage=2.65, Manufacturer=Kingbright, Supplier Part Number 1=754-1939-1-ND, Part_Number=APT2012LZGCK, Price=0.86, Price_10=0.673, Supplier 1=Digi-Key, Supplier_Link=http://www.digikey.ca/product-detail/en/kingbright/APT2012LZGCK/754-1939-1-ND/5177469
D5: library part 150060VS75000, "Green LED 0603, 2V, 20mA", Manufacturer="Wurth Electronics", Part_Number=150060VS75000, Price=0.34, Price_10=0.3968, Supplier_Link=http://www.digikey.ca/product-detail/en/wurth-electronics-inc/150060VS75000/732-4980-1-ND/4489904
D6: library part PESD1CAN-UX, "CAN bus ESD protection diode", Manufacturer=NXP, Supplier Part Number 1=568-10731-2-ND, Part_Number=PESD1CAN-UX, Price=0.51, Price_10=0.417, Supplier 1=Digi-Key, Supplier_Link=http://www.digikey.ca/product-detail/en/nxp-semiconductors/PESD1CAN-UX/568-10731-1-ND/4386316
D7: library part LTST-C150KGKT, "Green LED 1206", Forward Voltage="2V @ 20 mA", Manufacturer=Liteon, Part_Number=LTST-C150KGKT, Price=0.55, Price_10=0.40, Supplier_Link=http://www.digikey.ca/product-detail/en/LTST-C150KGKT/160-1404-1-ND/386759
F1: library part 0453.500MR, "500mA Surface Mount Fuses 453 Series NANO2® Very Fast-Acting Fuse", Manufacturer="Littelfuse Inc.", Rated_Voltage_DC=125V, Supplier Part Number 1=F1251CT-ND, Part_Number=0154010.DR, Part_Number_Fuse=0453.500MR, Supplier 1=Digi-Key, Supplier 2=Digi-Key, Supplier_Link=http://www.digikey.ca/product-detail/en/0154010.DR/F1251CT-ND/565519, Supplier_Link_Fuse=http://www.digikey.ca/product-detail/en/0453.500MR/F3135CT-ND/1984431, Supplier Part Number 2=F3135CT-ND
J1: library part JTAG_Header, "JTAG header, MCU programming"
J2: "Header, 2-Pin"
J3: library part "Header 5", "Header, 5-Pin"
J5: library part "Header 4", "Header, 4-Pin"
J6 J8 J9 J10: library part "Header 2", "Header, 2-Pin"
L1: library part BKP2125HS600-T, "0805 Ferrite bead, 60 Ohms at 100 MHz", Current_Rating=3A, Manufacturer="Taiyo Yuden", Part_Number=BKP2125HS600-T, Supplier_Link=http://www.digikey.ca/product-detail/en/BKP2125HS600-T/587-1932-1-ND/1465402
R1 R2 R3 R4: "100 kOhm resistor", Manufacturer=Vishay, Part_Number=CRCW0603100KJNEA, Price=0.15, Price_10=0.033, Supplier_Link=http://www.digikey.ca/product-detail/en/CRCW0603100KJNEA/541-100KGCT-ND/1179417
R5 R6: "100 Ohms resistor, 1/4W", Manufacturer="Rohm Semiconductor", Part_Number=ESR03EZPJ101, Price=0.15, Price_10=0.12, Supplier_Link=http://www.digikey.ca/product-detail/en/ESR03EZPJ101/RHM100DCT-ND/1983776
R7: "10 kOhms resistor", Manufacturer=Vishay, Part_Number=CRCW060310K0JNEA, Price=0.15, Price_10=0.033, Supplier_Link=http://www.digikey.ca/product-detail/en/CRCW060310K0JNEA/541-10KGCT-ND/1179393
R8 R9 R10 R11 R12: "220 Ohms 0.25W Resistor", Manufacturer="Rohm Semiconductor", Power=0.25W, Supplier Part Number 1=RHM220DCT-ND, Tolerance=5%, Part_Number=ESR03EZPJ221, Price=0.15, Supplier 1=Digi-Key, Supplier_Link=http://www.digikey.ca/product-detail/en/ESR03EZPJ221/RHM220DCT-ND/1983788
  R11: Price_10=0.12
R13: "10 kOhms 1% 0.1W Resistor", Manufacturer="Panasonic Electronic Components", Power=0.1W, Supplier Part Number 1=P10.0KHCT-ND, Tolerance=1%, Part_Number=ERJ-3EKF1002V, Price_10=0.095, Supplier 1=Digi-Key, Supplier_Link=https://www.digikey.ca/product-detail/en/panasonic-electronic-components/ERJ-3EKF1002V/P10.0KHCT-ND/198102
R14 R15: "60 Ohms 0.25W Resistor", Manufacturer="Rohm Semiconductor", Power=0.25W, Supplier Part Number 1=RHM62DCT-ND, Tolerance=5%, Part_Number=ESR03EZPJ620, Price=0.15, Supplier 1=Digi-Key, Supplier_Link=http://www.digikey.ca/product-detail/en/ESR03EZPJ620/RHM62DCT-ND/1983794
R16: "4.7 kOhms resistor", Manufacturer=Vishay, Part_Number=CRCW06034K70JNEA, Price=0.15, Price_10=0.033, Supplier_Link=http://www.digikey.ca/product-detail/en/CRCW06034K70JNEA/541-4.7KGCT-ND/1179385
R17: "0 Ohm Resistor", Manufacturer="Vishay Dale", Manufacturer Part Number=CRCW06030000Z0EA, Power=0.1W, Supplier Part Number 1=541-0.0GCT-ND, Part_Number=CRCW06030000Z0EA, Price=0.11, Supplier 1=Digi-Key, Supplier_Link=http://www.digikey.ca/product-detail/en/CRCW06030000Z0EA/541-0.0GCT-ND/1179296
R18: "220 Ohms resistor, 1/4W", Manufacturer="Rohm Semiconductor", Part_Number=ESR03EZPJ221, Price=0.15, Supplier_Link=ESR03EZPJ221
R19: "10 kOhms 1% 0.1W Resistor", Manufacturer="Vishay Dale", Power=0.1W, Supplier Part Number 1=541-10.0KHCT-ND, Tolerance=1%, Part_Number=CRCW060310K0FKEA, Price_10=0.125, Supplier 1=Digi-Key, Supplier_Link=http://www.digikey.ca/product-detail/en/CRCW060310K0FKEA/541-10.0KHCT-ND/1179924
SW1 SW3: "Pushbutton switch SPST, 2 pins", Manufacturer="TE Connectivity", Part_Number=147873-1, Price=0.30
  SW1: Supplier_Link=http://ca.mouser.com/ProductDetail/TE-Connectivity-Alcoswitch/147873-1/?qs=sGAEpiMZZMvxtGF7dlGNpsxRhg8g8FqHC2R98arEfD8%3d
  SW3: Supplier_Link=http://www.te.com/usa-en/product-147873-1.html
SW2: "SWITCH SLIDE DPDT 200MA 12VDC", Manufacturer="Copal Electronics Inc.", Supplier Part Number 1=563-1338-1-ND, Part_Number=CL-SB-22A-01T, Price=1.4, Price_10=1.347, Supplier 1=Digi-Key, Supplier_Link=http://www.digikey.ca/product-detail/en/copal-electronics-inc/CL-SB-22A-01T/563-1338-1-ND/3507893
U1: library part TM4C123GH6PM, "High performance 32-bit ARM® Cortex®-M4F based MCU", Manufacturer="Texas Instruments", Supplier Part Number 1=296-35848-ND, Part_Number=TM4C123GH6PM, Price=16.430, Price_10=14.8320, Sample_Link=http://www.ti.com/product/TM4C123GH6PM/samplebuy, Supplier 1=Digi-Key, Supplier_Link=http://www.digikey.ca/product-detail/en/TM4C123GH6PMI/296-35848-ND/4036462
U2: library part SN74LVC3G07-Q1, "Triple Buffer/Driver  With Open-drain Outputs", Manufacturer="Texas Instrument", Sink current="32 mA @ 4.5V", Supplier Part Number 1=296-23710-1-ND, Note="Q1 (automotive) version only available in TSSOP50 footpring", Part_Number=SN74LVC3G07QDCURQ1, Price=0.94, Price_10=0.811, Supplier 1=Digi-Key, Supplier_Link=http://www.digikey.ca/product-detail/en/texas-instruments/SN74LVC3G07QDCURQ1/296-23710-1-ND/1948115
U3: library part HVDA551-Q1, "Automotive 5-V CAN Transceiver with I/O Level Adapting and Low-Power Mode Supply Optimization", Manufacturer="Texas Instrument", Supplier Part Number 1=296-40116-1-ND, Part_Number=HVDA551-Q1, Price=2.450, Price_10=2.201, Sample_Link=http://www.ti.com/product/HVDA551-Q1/samplebuy, Supplier 1=Digi-Key, Supplier_Link=http://www.digikey.ca/product-detail/en/HVDA551QDRQ1/296-40116-1-ND/5177993
U4: "GPS Standalone Module", Manufacturer="GlobalTop Technology Inc.", Part_Number=FGPMMOPA6H, Supplier_Link=http://www.adafruit.com/products/790, Type="GPS Module"
U5: "IMU ACCEL/GYRO/COMPI2C/SPI 24QFN", Manufacturer="TDK InvenSense", Part_Number=ICM-20948, Supplier_Link=https://www.digikey.ca/product-detail/en/tdk-invensense/ICM-20948/1428-1123-1-ND/7062698
U6: library part TXS0108EQPWRQ1, "Voltage Level Translator, Bidirectional, 1 Circuit 8 Channel, 110Mbps, for Open-Drain and Push-Pull Applications, ESD Protection", Manufacturer="Texas Instruments", Supplier Part Number 1=296-42401-1-ND, Part_Number=TXS0108EQPWRQ1, Price=3.69, Price_10=3.317, Supplier 1=Digi-Key, Supplier_Link=http://www.digikey.ca/product-detail/en/texas-instruments/TXS0108EQPWRQ1/296-42401-1-ND/5356982
V1: Manufacturer="Harwin Inc.", Part_Number=S8201-46R, Price=0.68, Supplier_Link=https://www.digikey.ca/product-detail/en/harwin-inc/S8201-46R/952-1662-1-ND/2627209
X1: library part 43650-0400, "Molex Micro-Fit 3.0, 4 Circuits, Single Row, Right-Angle Through-Hole Header, 3.00mm Pitch, with Solder Tab, Tin, Glow Wire Capable, Black", Manufacturer="Molex, LLC", Mounting_Type="SMD, Vertical", Part_Number=43650-0424, Part_Number_Crimp=43030-0001, Part_Number_Mating=43645-0400, Supplier_Link=http://www.digikey.ca/product-detail/en/molex-llc/0436500424/WM2629CT-ND/1634981, Supplier_Link_Crimp=http://www.digikey.ca/product-detail/en/molex-llc/0430300001/WM1837CT-ND/467810, Supplier_Link_Mating=http://www.digikey.ca/products/en?keywords=43645-0400
X2: library part 475710001, "microSD connector, Surface Mount, Right Angle", Manufacturer=Molex, Part_Number=47571-0001, Price=1.39, Price_10=1.227, Supplier_Link=http://www.digikey.ca/product-search/en/connectors-interconnects/memory-connectors-pc-card-sockets/1442985?k=475710001&k=&pkeyword=475710001&pv7=2&FV=fff40016%2Cfff804a9&mnonly=0&newproducts=0&ColumnSort=0&page=1&stock=1&quantity=0&ptm=0&fid=0&pageSize=25
X3: library part 5-1814832-1, "SMA Connector Jack, Female Socket 50 Ohm Through Hole Solder", Manufacturer="TE Connectivity AMP Connectors", Part_Number=5-1814832-1, Price=2.8, Supplier_Link=http://www.digikey.ca/product-detail/en/te-connectivity-amp-connectors/5-1814832-1/A97594-ND/1755982
Y1: "Crystal Oscillator 16 MHz", Manufacturer=NDK, ESR="120 Ohms", Part_Number=NX5032GA-16.000M-LN-CD-1, Price=0.95, Price_10=0.796, Supplier_Link=http://www.digikey.ca/product-detail/en/NX5032GA-16.000000MHZ-LN-CD-1/644-1037-1-ND/1128909

## Free pads (board coordinates)
  round 236.22 hole 169.29: 2(143.7,144.69) 2(143.7,2085.63) 2(3377.95,138.78) 2(3377.95,2085.63)

## Via types
v1: diameter 25, hole 12, Top Layer to Bottom Layer, 29 vias
v2: diameter 20, hole 10, Top Layer to Bottom Layer, 27 vias

## Nets (pads, with @x,y where several pads share a name; then routed paths per layer and width w, separated by ;. In a path a pad name is that pad's centre, name@x,y a point inside that pad or via, vN(x,y) a via of type N, cw(c..) or ccw(c..) an arc to the next point about the centre after c; other vN are vias at no path point)
1.8V: A3.5 C18.2 C31.2 C33.2 C34.2 R12.2 U5.8 U5.13 U6.19 | length 1334.9
  Top Layer w8: C33.2 743.11,459.65 809.06,393.7 U5.8 ; A3.5@790.35,206.69 847.44,263.78 U5.13
  Top Layer w10: C33.2 664.37,505.91 619.49,505.91 567.91,454.33 567.91,359.25 611.22,315.94 C34.2 758.86,206.69 A3.5 790.35,206.69 844.49,206.69 R12.2 ; C18.2 851.38,147.64 R12.2 ; C31.2 1041.34,235.24 1018.7,257.87 ; U6.19 1018.7,257.87 ; R12.2 895.67,257.87 1018.7,257.87
3.3V: A2.3 A4.1 C4.2 C5.2 C6.2 C7.2 C8.2 C9.2 C16.2 C21.2 C23.2 C24.2 C26.2 C30.2 D1.1 D2.1 D3.1 J1.1 J10.1 J10.2 R1.2 R2.2 R3.2 R4.2 R7.2 R11.2 R16.2 R17.1 U1.2 U1.11 U1.26 U1.37 U1.42 U1.54 U2.8 U3.5 U6.2 X2.4 | length 14497.7
  Top Layer w10: A4.1 354.33,1445.87 C23.2 655.51,1144.69 C24.2 ; v1(1880.91,893.7) 1881.89,894.69 U1.11 ; v1(2012.8,893.7) 2059.06,939.96 U1.2 ; U2.8 2483.27,1236.22 v2(2485.24,1234.25) ; R1.2 2499.21,498.82 J1.1 ; D2.1@2500,1648.62 2613.19,1648.62 ; J10.1@2875.98,1658.46 J10.1 ; J10.2@2875.98,1758.46 J10.1 ; R11.2 3000,1621.06 2947.83,1673.23 J10.1
  Top Layer w12: C30.2 1461.61,257.87 U6.2 1330.71,257.87 1297.24,224.41 1297.24,166.34 1392.72,70.87 2476.38,70.87 2636.81,231.3 v1(2636.81,454.72) ; C5.2@1507.38,589.07 1507.38,600.89 1623.03,716.54 U1.26 2050.2,716.54 2069.88,696.85 U1.54 2381.89,696.85 C7.2 2593.5,908.46 ; v1(1807.09,292.32) R7.2 ; U1.37@1863.19,520.67 1863.19,604.33 1885.83,626.97 1937.01,626.97 1961.61,602.36 U1.42@1961.61,520.67 ; U1.42 1960.63,489.17 C6.2 ; v2(2357.28,619.09) 2393.7,619.09 R4.2
  Top Layer w20: A4.1 342.52,1774.61 758.86,2190.94 1878.94,2190.94 2322.83,1747.05 2515.75,1747.05 2676.18,1586.61 2676.18,1580.71 ; R16.2 1491.14,2187.99 ; D3.1 D1.1 2486.22,1651.57 D2.1@2490.16,1647.64 ; C26.2 2699.8,2139.76 2753.94,2085.63 2753.94,1658.46 ; A2.3 2676.18,1300.2 C16.2 2676.18,1580.71 ; J10.1@2875.98,1658.46 2753.94,1658.46 ; 2676.18,1580.71 2753.94,1658.46
  Top Layer w25: C6.2 2116.14,409.45 2191.93,485.24 v1(2257.87,485.24) 2257.87,541.34 R3.2 ; R2.2 2636.81,568.9 v1(2636.81,454.72) ; R2.2@2593.5,613.19 2593.5,908.46 v1(2593.5,1201.77) A2.3
  Bottom Layer w10: v1(2012.8,893.7) 2012.8,847.44 C9.2 ; R17.1 2339.57,1379.92 v2(2485.24,1234.25) 2492.13,1227.36 2492.13,1201.77
  Bottom Layer w12: v1(1807.09,292.32) 1866.14,233.27 2053.15,233.27 2114.17,294.29 v1(2114.17,410.43) ; v2(2357.28,619.09) 2357.28,536.42 2409.45,484.25 ; J10.1@2875.98,1658.46 2980.32,1554.13 2980.32,1366.14 2893.9,1279.72 U3.5 2893.9,1141.54 2915.35,1120.08 2960.63,1120.08 2981.3,1140.75 C21.2
  Bottom Layer w20: X2.4 2556.1,2074.8 v1(2622.05,2140.75)
  Bottom Layer w25: v1(1880.91,893.7) 1882.87,891.73 C4.2 C8.2 C9.2 2133.86,843.5 2492.13,1201.77 v1(2593.5,1201.77) ; v1(2257.87,485.24) 2258.86,484.25 2409.45,484.25 2484.65,409.06 J1.1 2591.14,409.06 v1(2636.81,454.72)
5V: A1.3 A2.1 A3.1 A3.3 C15.2 C17.2 C19.2 C20.2 J1.2 J8.1 J8.2 U3.3 | length 5484.3
  Top Layer w12: v2(2941.93,1508.86) 2982.28,1468.5 2982.28,1464.57
  Top Layer w20: C19.2 665.35,44.29 781.5,44.29 ; A3.3 693.9,131.89 724.41,101.38 ; A3.1 698.82,206.69 724.41,181.1 724.41,101.38 ; C17.2 2827.76,1384.84 2865.16,1347.44 ; J8.1@3182.58,1664.86 2982.28,1464.57 2865.16,1347.44 ; J8.1@3188.98,1658.46 J8.1 J8.2 ; A1.3 3094.49,1223.62 ; 724.41,101.38 781.5,44.29 ; 781.5,44.29 2492.13,44.29 2696.85,249.02 v1(2696.85,308.07) 2696.85,375 2967.52,645.67 2967.52,1096.65 3094.49,1223.62 ; 2865.16,1347.44 A2.1 2865.16,1252.95 2894.49,1223.62 3094.49,1223.62
  Bottom Layer w12: U3.3 2843.9,1450.2 2856.3,1462.6 C20.2 2849.41,1508.86 v2(2941.93,1508.86)
  Bottom Layer w20: J1.2 2501.18,307.09 2502.17,308.07 v1(2696.85,308.07) ; C15.2 3155.31,1223.62 A1.3
24V: A1.1 C14.2 F1.2 J6.1 J6.2 | length 1036.6
  Top Layer w20: A1.1 3355.31,1096.46 J6.2@3355.31,1527.56
  Top Layer w50: A1.1 3381.89,924.21 F1.2
  Bottom Layer w20: C14.2 3153.54,1023.62 A1.1
Accel_CLK: 
Accel_CS: U5.22 U6.17 | length 225.4
  Top Layer w8: U5.22 1013.78,377.95 1082.68,309.06 U6.17
Accel_INT: U5.12 U6.18 | length 468.5
  Top Layer w8: v2(794.29,276.57) 778.54,292.32 778.54,307.09 802.17,330.71 U5.12 ; v2(1043.31,283.46) U6.18
  Bottom Layer w8: v2(794.29,276.57) 819.88,250.98 1010.83,250.98 v2(1043.31,283.46)
ACCEL_SCLK: U5.23 U6.16 | length 221.3
  Top Layer w8: U5.23 1021.65,393.7 1080.71,334.65 U6.16
Accel_SDI: 
Accel_SDO: 
ACCEL_SIMO: U5.24 U6.15 | length 217.2
  Top Layer w8: U5.24 1032.48,409.45 1081.69,360.24 U6.15
ACCEL_SOMI: U5.9 U6.14 | length 561.5
  Top Layer w8: v2(751.97,406.5) 780.51,377.95 U5.9 ; v2(998.03,477.36) 998.03,476.38 1088.58,385.83 U6.14
  Bottom Layer w8: v2(751.97,406.5) 751.97,429.13 799.21,476.38 992.13,476.38 v2@998.03,482.28
CAN_H: D6.2 SW2.5 U3.7 X1.4 | length 1046.3
  Bottom Layer w12: SW2.5 2679.13,837.91 ; X1.4 2791.34,383.07 D6.2 2791.34,495.08 2679.13,607.28 2679.13,837.91 ; U3.7 2793.9,1138.39 2679.13,1023.62 2679.13,837.91
CAN_L: D6.1 SW2.2 U3.6 X1.3 | length 1028.7
  Bottom Layer w12: U3.6 2843.9,1141.34 2940.94,1044.29 2940.94,843.19 ; SW2.2 2940.94,843.19 ; X1.3 2842.52,390.16 D6.1 2842.52,496.06 2940.94,594.49 2940.94,843.19
CAN_RX: U1.59 U3.4 | length 1110.7
  Top Layer w10: U1.59 2272.64,795.28 2558.07,1080.71 2558.07,1223.43 v2(2599.41,1264.76)
  Bottom Layer w10: v2@2599.41,1262.8 2817.91,1262.8 2893.9,1338.78 U3.4
CAN_TX: U1.60 U3.1 | length 949.1
  Top Layer w10: U1.60 2260.83,814.96 2537.4,1091.54 2537.4,1231.04 2599.41,1293.05 v2(2599.41,1296.26)
  Bottom Layer w10: v2(2599.41,1296.26) 2696.85,1296.26 2743.9,1343.31 U3.1
CS_SD: J5.4 U1.57 X2.2 | length 1631.5
  Top Layer w10: U1.57 2109.25,755.91 2085.63,779.53 2085.63,919.29 2121.06,954.72 2121.06,1186.35 2183.73,1249.02 v1(2190.94,1249.02)
  Bottom Layer w10: v1(2190.94,1249.02) 2190.94,1374.02 2692.52,1875.59 J5.4 2642.72,1930.71 X2.2
GND: A1.2 A2.2 A3.2 A4.10 C1.1 C2.1 C3.1 C4.1 C5.1 C6.1 C7.1 C8.1 C9.1 C10.1 C11.1 C12.1 C13.1 C14.1 C15.1 C16.1 C17.1 C18.1 C19.1 C20.1 C21.1 C22.2 C23.1 C24.1 C25.1 C26.1 C27.1 C28.1 C29.1 C30.1 C31.1 C32.1 C33.1 C34.1 D4.1 D5.1 D6.3 D7.2 J1.8 J9.1 J9.2 pad.2 R13.1 R19.1 SW1.1 SW3.1 U1.3 U1.12 U1.27 U1.32 U1.34 U1.35 U1.39 U1.55 U2.4 U3.2 U4.3 U4.8 U4.12 U4.19 U5.11 U5.18 U5.20 U6.11 V1.2 X1.2 X2.0 X2.6 X3.1 | length 4527.8
  Top Layer w8: C34.1 748.03,315.94 778.54,346.46 U5.11 ; U5.18 926.18,298.23 936.02,288.39 v2(992.13,288.39) 992.13,327.76 973.43,346.46 U5.20
  Top Layer w10: C23.1 654.53,1056.1 683.07,1027.56 v1(688.98,1027.56) 697.83,1027.56 725.39,1055.12 C24.1 ; SW3.1 754.92,1757.81 C25.1 ; v1(1390.75,563.98) 1406.5,563.98 ; R19.1 1437.99,532.48 1406.5,563.98 ; C13.1 C12.1 C11.1 C10.1 C5.1 1406.5,563.98 ; SW1.1 1739.17,308.07 C1.1 ; U1.32 1806.1,598.43 v1(1811.02,593.5) ; U1.27 1749.02,696.85 1811.02,634.84 v1(1811.02,593.5) ; U1.34 1803.15,585.63 v1(1811.02,593.5) ; U1.35 1822.83,581.69 v1(1811.02,593.5) ; U1.12 v1(1862.2,1033.46) ; C2.1 1887.8,320.87 1918.31,290.35 1953.74,325.79 C3.1 ; U1.39@1902.56,520.67 v2(1902.56,592.52) ; U1.3 2039.37,1020.67 v1(2051.18,1032.48) ; C6.1 2040.35,293.31 v1(2041.34,292.32) ; U1.55 2218.5,716.54 v1(2236.22,734.25) ; v1(2156.5,1847.44) 2156.5,1652.56 D7.2 ; J1.8@2192.91,309.06 J1.8 ; U2.4 2349.41,1177.17 2374.02,1201.77 v2(2377.95,1201.77) ; v1(2426.18,2138.78) 2427.17,2139.76 C26.1 ; C7.1 2504.92,756.89 v1(2504.92,760.83)
  Top Layer w12: C33.1 647.64,388.78 C32.1 648.62,379.92 C34.1 ; C18.1 1039.37,146.65 C31.1 1112.2,144.69 v2(1115.16,141.73) ; U6.11 1247.05,462.6 v2(1248.03,461.61) ; C30.1 1463.58,140.75 v2(1465.55,138.78) ; v2(2737.2,1540.35) 2738.19,1540.35 2779.53,1499.02 ; C16.1 2739.17,1458.66 2779.53,1499.02 ; C17.1 2840.55,1499.02 2779.53,1499.02 ; D4.1 3057.09,1854.33 3277.82,1854.33 J9.2
  Top Layer w20: v2(578.74,250) 578.74,195.87 C19.1 608.27,194.88 633.86,169.29 A3.2
  Top Layer w25: v1(2630.91,1020.67) 2750.98,1020.67 A2.2
  Bottom Layer w10: 2340.55,2144.69 2346.46,2138.78 v1(2426.18,2138.78) 2426.18,2117.13 2469.49,2073.82 X2.6
  Bottom Layer w12: C20.1 2793.9,1501.38 U3.2
  Bottom Layer w25: X2.0@2340.55,2105.32 2340.55,2144.69 X2.0@2340.55,2197.44 ; X2.0@2750,2112.8 2758.86,2121.65 2758.86,2167.91 2758.86,2207.68 X2.0@2750.98,2215.55
  other v1: 1721.46,292.32 1918.31,292.32
  other v2: 763.78,331.69 803.15,1712.6
GPS_Rx: J2.2 R6.2 U4.10 | length 789.1
  Top Layer w10: R6.2 1432.09,1120.08 1380.91,1171.26 1380.91,1318.9 J2.2 1574.27,1426.18 1639.76,1360.69 v2(1639.76,1261.81)
  Bottom Layer w10: U4.10@1639.76,1143.7 v2(1639.76,1261.81)
GPS_Tx: J2.1 R5.2 U4.9 | length 532.9
  Top Layer w10: R5.2 1420.28,1225.39 1420.28,1258.27 J2.1
  Bottom Layer w10: J2.1 1632.48,1326.18 1698.82,1259.84 U4.9@1698.82,1142.72
MCU_ACCEL_CS: U1.31 U6.4 | length 500.1
  Top Layer w10: U6.4 1421.26,309.06 1633.37,521.16 1633.37,574.94 1676.53,618.11 U1.31
MCU_ACCEL_INT: U1.24 U6.3 | length 697
  Top Layer w10: U6.3 1428.15,283.46 v2(1501.97,357.28) ; v2(1622.05,755.91) U1.24
  Bottom Layer w10: v2(1501.97,357.28) 1582.68,437.99 1582.68,715.55 v2@1621.06,753.94
MCU_ACCEL_OE: R19.2 U1.23 U6.10 | length 566.6
  Top Layer w10: U6.10 1437.01,462.6 R19.2 1558.07,583.66 1558.07,613.19 v2(1560.04,611.22) ; v2(1592.52,775.59) 1592.83,775.91 1705.39,775.91 U1.23
  Bottom Layer w10: v2(1560.04,611.22) 1560.04,743.11 v2(1592.52,775.59)
MCU_ACCEL_SCLK: U1.30 U6.5 | length 497.6
  Top Layer w10: U6.5 1425.64,334.65 1618.37,527.37 1618.37,581.16 1675.01,637.8 U1.30
MCU_ACCEL_SIMO: U1.29 U6.6 | length 495.2
  Top Layer w10: U6.6 1430.01,360.24 1603.37,533.59 1603.37,587.37 1673.48,657.48 U1.29
MCU_ACCEL_SOMI: U1.28 U6.7 | length 492.5
  Top Layer w10: U6.7 1434.06,385.83 1587.6,539.37 1587.6,592.81 1671.95,677.17 U1.28
MCU_DEBUG_LED_G: U1.64 U2.1 | length 439.4
  Top Layer w10: U1.64 2187.99,893.7 2227.36,933.07 2227.36,1165.35 2298.23,1236.22 U2.1
MCU_DEBUG_LED_R: U1.62 U2.6 | length 511.2
  Top Layer w10: U1.62 2213.58,854.33 2274.61,915.35 2274.61,1062.01 2409.45,1196.85 U2.6
MCU_DEBUG_LED_Y: U1.63 U2.3 | length 428.9
  Top Layer w10: U1.63 2199.8,874.02 2250.98,925.2 2250.98,1153.54 2294.29,1196.85 U2.3
MCU_GPS_Rx: R5.1 U1.17 | length 398.1
  Top Layer w10: R5.1 1594.49,1110.24 1594.49,968.5 1669.29,893.7 U1.17
MCU_GPS_Tx: R6.1 U1.18 | length 351.9
  Top Layer w10: R6.1 1575.79,1057.09 1575.79,959.65 1661.42,874.02 U1.18
MISO_SD: J5.1 U1.1 X2.7 | length 1242.8
  Top Layer w10: U1.1 2078.74,1180.12 v1(2082.68,1184.06)
  Bottom Layer w10: v1(2082.68,1184.06) 2082.68,1440.94 2391.73,1750 2391.73,1877.95 J5.1@2405.51,1891.73 ; J5.1 2426.18,1914.57 X2.7
MOSI_SD: J5.3 U1.4 X2.3 | length 1341
  Top Layer w10: U1.4 2019.69,1162.4 v1(2146.65,1289.37)
  Bottom Layer w10: v1(2146.65,1289.37) 2146.65,1393.7 2594.49,1841.54 2594.49,1875.98 J5.3@2578.74,1891.73 ; J5.3 2599.41,1887.8 X2.3
NetC2_2: C2.2 U1.40 Y1.1 | length 343.7
  Top Layer w12: Y1.1@1847.44,215.55 1847.44,371.06 1885.83,409.45 C2.2 1921.26,442.91 U1.40@1921.26,527.56
NetC3_2: C3.2 U1.41 Y1.2 | length 330.2
  Top Layer w12: U1.41 1940.94,422.24 C3.2 1999.02,364.17 Y1.2@1999.02,214.57
NetC10_2: C10.2 C11.2 C12.2 C13.2 U1.25 U1.56 | length 854.6
  Top Layer w10: C10.2 C11.2 C11.2@1500.98,736.22 ; C13.2 C12.2 1500.98,737.2 C11.2@1500.98,736.22 ; U1.56 U1.25 1705.39,735.91 1501.3,735.91 C11.2@1500.98,736.22
NetC22_1: C22.1 R14.1 R15.1 | length 153.5
  Bottom Layer w20: R14.1@2742.13,632.87 R15.1@2895.67,632.87
NetC27_2: C27.2 C28.2 L1.2 U4.1 | length 378.8
  Bottom Layer w10: U4.1@2164.37,1117.13 U4.1 2164.37,1070.87 2186.02,1049.21 2218.5,1049.21 2275.59,1106.3 C28.2 C27.2 2275.59,1293.64 L1.2
NetC29_2: C29.2 U4.4 V1.1 | length 1410.5
  Bottom Layer w10: U4.4 1987.2,1018.7 C29.2
  Bottom Layer w20: V1.1 1063.98,1812.01 1347.44,1528.54 1642.72,1528.54 1987.2,1184.06 U4.4
NetC32_2: C32.2 U5.10 | length 124.8
  Top Layer w8: C32.2 737.2,362.2 U5.10
NetD1_2: D1.2 R8.2 | length 117.5
  Top Layer w10: D1.2@2387.8,1508.86 2388.78,1507.87 R8.2
NetD2_2: D2.2 R9.2 | length 136.3
  Top Layer w10: R9.2 2455.71,1479.33 D2.2
NetD3_2: D3.2 R10.2 | length 135.1
  Top Layer w10: D3.2 2320.87,1482.28 R10.2
NetD4_2: D4.2 R11.1 | length 68.9
  Top Layer w10: R11.1@3022.64,1672.24 D4.2
NetD5_2: D5.2 R12.1 | length 67.1
  Top Layer w10: R12.1 963.58,213.58 D5.2
NetD7_1: D7.1 R18.1 | length 121.5
  Top Layer w10: R18.1 2157.48,1511.81 D7.1
NetF1_1: F1.1 X1.1 | length 350.1
  Top Layer w50: X1.1 3115.75,681.5 F1.1
NetL1_1: L1.1 R17.2 | length 113.8
  Bottom Layer w10: R17.2 2276.57,1363.52 L1.1
NetR8_1: R8.1 U2.7 | length 167.5
  Top Layer w10: R8.1 2375.98,1319.88 2375.98,1247.05 2406.5,1216.54 U2.7
NetR9_1: R9.1 U2.5 | length 229.4
  Top Layer w10: U2.5 2471.46,1177.17 2514.76,1220.47 2514.76,1273.62 R9.1
NetR10_1: R10.1 U2.2 | length 163.9
  Top Layer w10: U2.2 2344.49,1216.54 2358.27,1230.32 2358.27,1295.28 R10.1
NetR14_2: R14.2 SW2.6 | length 132.4
  Bottom Layer w20: R14.2@2742.13,691.93 2742.13,802.48 SW2.6
NetR15_2: R15.2 SW2.3 | length 114.4
  Bottom Layer w20: R15.2@2887.8,698.54 SW2.3@2887.8,812.99
NetR18_2: R18.2 U4.5 | length 360.7
  Top Layer w10: v1(1928.15,1188.98) 2071.85,1332.68 R18.2
  Bottom Layer w10: U4.5@1928.15,1117.13 v1(1928.15,1188.98)
NetU4_11: U4.11 X3.2 | length 248.9
  Bottom Layer w20: U4.11 1632.87,1984.33 X3.2
RST: C1.2 J1.7 R7.1 SW1.2 U1.38 | length 1519.2
  Top Layer w12: U1.38@1881.89,526.57 U1.38 1881.89,484.25 R7.1 C1.2 1651.57,409.45 SW1.2 1513.78,271.65 1513.78,148.62 1561.02,101.38 2002.95,101.38 2113.19,211.61 2113.19,323.03 J1.7
SCLK_SD: J5.2 U1.58 X2.5 | length 1544.2
  Top Layer w10: U1.58 2122.05,775.59 2102.36,795.28 2102.36,910.43 2163.39,971.46 v1(2163.39,1187.01)
  Bottom Layer w10: v1(2163.39,1187.01) 2112.2,1238.19 2112.2,1414.37 2492.13,1794.29 J5.2@2492.13,1891.73 ; J5.2 2512.8,1901.18 X2.5
STB_MODE: R13.2 U1.61 U3.8 | length 849.6
  Top Layer w12: U1.61 2250,834.65 2326.77,911.42 2326.77,981.3 v2(2508.86,1163.39)
  Bottom Layer w12: v2(2508.86,1163.39) 2653.54,1163.39 R13.2 2657.48,1142.72 2680.12,1120.08 2722.44,1120.08 2743.9,1141.54 U3.8
TCK: J1.4 R2.1 U1.52 | length 973.2
  Top Layer w10: U1.52 2319.88,657.48 2334.65,672.24 2474.41,672.24 R2.1 2583.66,562.99 2583.66,299.21 2532.48,248.03 2460.24,248.03 J1.4
TDI: J1.3 R1.1 U1.50 | length 404.1
  Top Layer w10: U1.50 2317.91,618.11 2395.67,540.35 2395.67,412.6 J1.3
TDO: J1.5 R3.1 U1.49 | length 325.7
  Top Layer w10: U1.49 2261.81,598.43 R3.1 2317.91,427.76 J1.5
TMS: J1.6 R4.1 U1.51 | length 890.4
  Top Layer w10: U1.51 2326.77,637.8 2345.47,656.5 2415.35,656.5 R4.1 2560.04,511.81 2560.04,384.84 2531.5,356.3 2346.46,356.3 J1.6
WIFI_ON_SLEEP: A4.13 U1.8 | length 1242.6
  Top Layer w10: A4.13 1189.96,875.98 v2(1230.32,875.98) ; v2(1938.98,914.37) 1938.98,969.49 U1.8
  Bottom Layer w10: v2(1230.32,875.98) 1228.35,874.02 1770.67,874.02 1812.85,916.2 1890.23,916.2 1891.07,915.35 v2@1933.07,915.35
WIFI_RESET: A4.5 C25.2 R16.1 SW3.2 U1.7 | length 1758.3
  Top Layer w12: A4.5 657.48,1518.7 SW3.2 791.34,1579.72 R16.1 1480.32,1579.72 1960.63,1099.41 U1.7
WIFI_SLEEP_RQ: A4.9 U1.9 | length 1323.7
  Top Layer w10: A4.9 1090.3,1563.72 1466.79,1563.72 1921.26,1109.25 U1.9
WIFI_SPI_CLK: A4.18 J3.2 U1.19 | length 1480.1
  Top Layer w10: A4.18 776.57,856.3 804.53,856.3 J3.2 996.46,1048.23 1456.69,1048.23 1650.59,854.33 U1.19
WIFI_SPI_MISO: A4.4 J3.5 U1.21 | length 1404.9
  Top Layer w10: J3.5 1479.33,974.41 1638.78,814.96 U1.21
  Bottom Layer w10: A4.4 800.2,1224.41 980.32,1224.41 1222.74,981.99 J3.5@1242.42,981.99
WIFI_SPI_MOSI: A4.11 J3.4 U1.22 | length 1126
  Top Layer w10: A4.11 1051.18,590.55 1375,914.37 ; J3.4 1182.68,914.37 1375,914.37 ; U1.22 1634.84,795.28 1515.75,914.37 1375,914.37
WIFI_SPI_NATTN: A4.19 J3.1 U1.6 | length 1921.6
  Top Layer w10: A4.19 815.94,974.41 J3.1 914.17,1065.94 1495.08,1065.94 1536.42,1024.61 v1(1537.4,1024.61) ; v1(1628.94,1022.64) 1781.5,870.08 1943.9,870.08 1980.32,906.5 U1.6
  Bottom Layer w10: v1(1537.4,1024.61) 1626.97,1024.61 v1(1628.94,1022.64)
WIFI_SPI_SSEL: A4.17 J3.3 U1.20 | length 1394.8
  Top Layer w10: A4.17 796.26,797.24 845.47,797.24 J3.3 1078.74,1030.51 1447.83,1030.51 1643.7,834.65 U1.20
pads on no net: A3.4 A4.2 A4.3 A4.6 A4.7 A4.8 A4.12 A4.14 A4.15 A4.16 A4.20 SW2.1 SW2.4 U1.5 U1.10 U1.13 U1.14 U1.15 U1.16 U1.33 U1.36 U1.43 U1.44 U1.45 U1.46 U1.47 U1.48 U1.53 U4.2 U4.6 U4.7 U4.13 U4.14 U4.15 U4.16 U4.17 U4.18 U4.20 U5.1 U5.2 U5.3 U5.4 U5.5 U5.6 U5.7 U5.14 U5.15 U5.16 U5.17 U5.19 U5.21 U6.1 U6.8 U6.9 U6.12 U6.13 U6.20 X1.0 X2.1 X2.8